# EAGLE board yep (EAGLE 7.6.0)
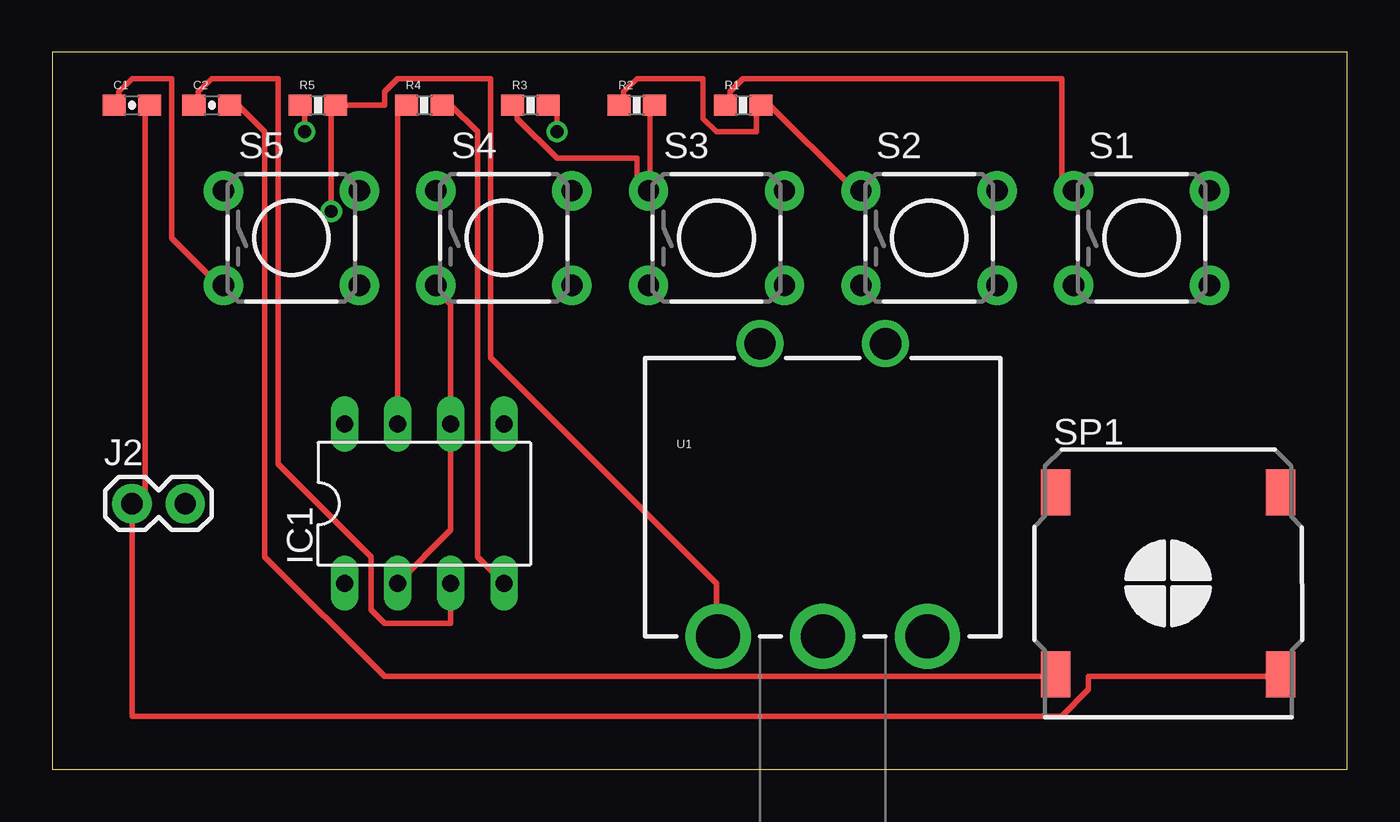
[diagram p0: board, top side]
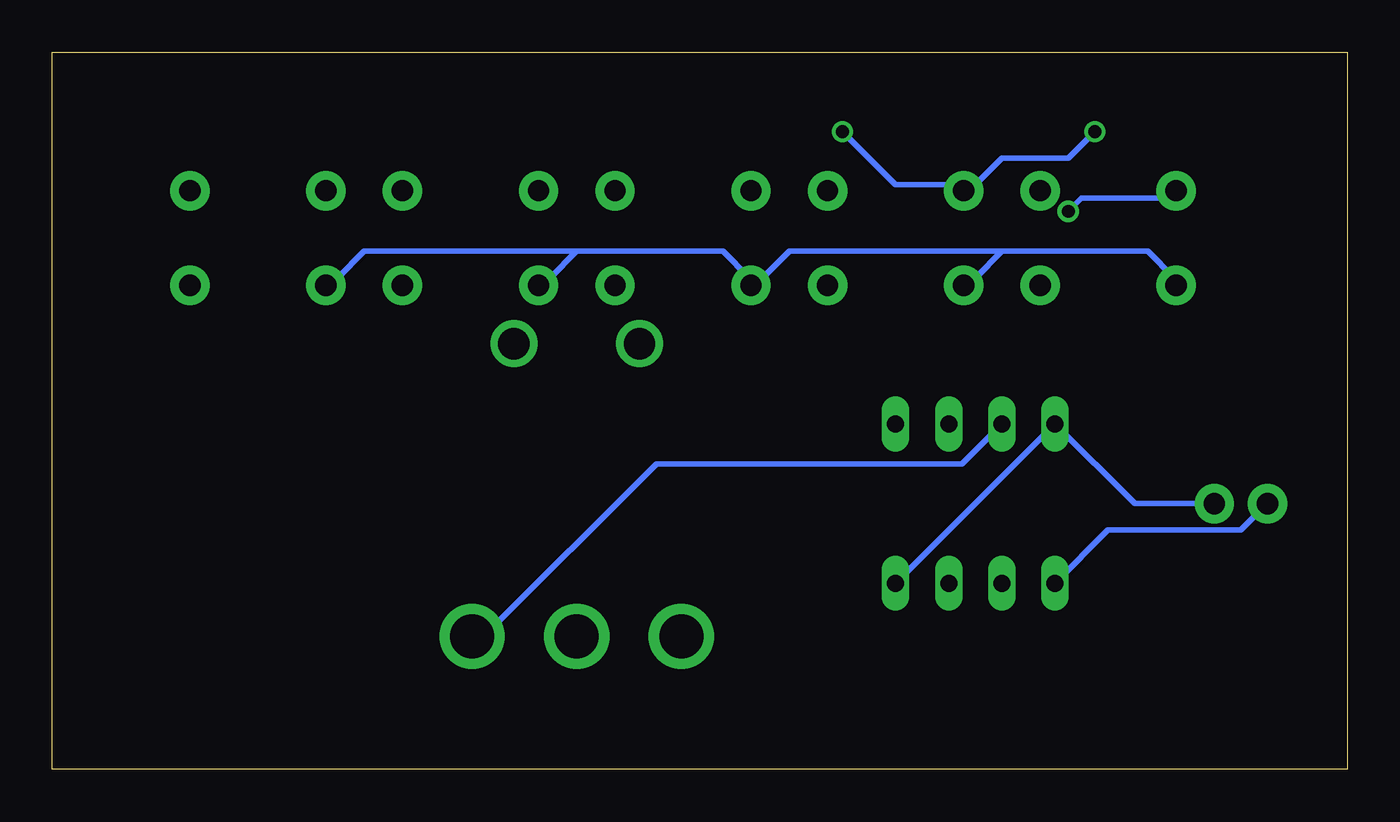
[diagram p1: board, bottom side, seen from below]

Size 61.9 x 34.28 mm. Coordinates in mm from the lower left corner, seen from the top.
Outline: 0,0 61.9,0 61.9,34.28 0,34.28 0,0
Copper layers (1*16): Top 0.035mm / dielectric 1.5mm / Bottom 0.035mm
Design rules "default": minimum track width 10mil, minimum drill 24mil, track to track 8mil, track to pad 8mil, pad to pad 8mil, via to via 8mil, smd to smd 8mil, copper to edge 40mil, drill to drill 8mil, minimum pad ring 10mil, minimum via ring 8mil, stop-mask expansion 4mil, vias tented up to drill 0mil, thermal gap 10mil

## Footprints (pad centres in the part's own frame; a part is rotated, then mirrored left to right if it is on the bottom)
0603-CAP = smd 1.1 x 1: 1 -0.85,0; 2 0.85,0
DIL-08 = drill 0.813 long: 1 -3.81,-3.81; 2 -1.27,-3.81; 3 1.27,-3.81; 4 3.81,-3.81; 5 3.81,3.81; 6 1.27,3.81; 7 -1.27,3.81; 8 -3.81,3.81
1X02 = drill 1.016 pad 1.88: 1 0,0; 2 2.54,0
0603-RES = smd 1.1 x 1: 1 -0.85,0; 2 0.85,0
TACTILE-PTH = drill 1.016 pad 1.88: 1 -3.251,2.261; 2 3.251,2.261; 3 -3.251,-2.261; 4 3.251,-2.261
SMS-1308MS-2-R = smd 1.4 x 2.2: + -5.375,-4.35; - 5.375,-4.35; M1 -5.375,4.35; M2 5.375,4.35
POT_PTH = drill 2.1: E@1 -5,0; E@2 5,0; WAND 0,0 | drill 1.5: S1 -3,14; S2 3,14

## Placement (x,y rotation side)
C1  100n  [0603-CAP]  3.81,31.75 0 top
C2  10u  [0603-CAP]  7.62,31.75 0 top
IC1  NE555  [DIL-08]  17.78,12.7 0 top
J2  [1X02]  3.81,12.7 0 top
R1  1k  [0603-RES]  33.02,31.75 0 top
R2  1k  [0603-RES]  27.94,31.75 0 top
R3  1k  [0603-RES]  22.86,31.75 0 top
R4  4.7k  [0603-RES]  17.78,31.75 0 top
R5  1k  [0603-RES]  12.7,31.75 0 top
S1  [TACTILE-PTH]  52.07,25.4 0 top
S2  [TACTILE-PTH]  41.91,25.4 0 top
S3  [TACTILE-PTH]  31.75,25.4 0 top
S4  [TACTILE-PTH]  21.59,25.4 0 top
S5  [TACTILE-PTH]  11.43,25.4 0 top
SP1  8Ohm  [SMS-1308MS-2-R]  53.34,8.89 0 top
U1  10k  [POT_PTH]  36.83,6.35 0 top

## Library data of the parts
C1 C2 = SparkFun-Capacitors
IC1 = st-microelectronics; MF: Arrow Electronics; MPN: NE555N; OC_FARNELL: 1467742; OC_NEWARK: 89K1486
J2 = SparkFun-Connectors
R1-R5 = SparkFun-Resistors
S1-S5 = SparkFun-Retired
SP1 = speaker
U1 = SparkFun-Electromechanical

## Nets
N$1: IC1.4 IC1.8 J2.2 R4.2
N$2: IC1.7 R4.1 U1.E@2
N$3: R1.2 R2.1 S2.1
N$4: R2.2 R3.1 S3.1
N$5: R3.2 R5.1 S4.1
N$6: R5.2 S5.1 U1.E@1
N$7: R1.1 S1.1
N$8: C1.1 IC1.2 IC1.6 S1.3 S2.3 S3.3 S4.3 S5.3
N$9: C2.1 IC1.3
N$10: C2.2 SP1.+
N$11: C1.2 IC1.1 J2.1 SP1.-

## Tracks (layer width: path | path; a pad name or v marks a point on that pad's centre or on a via)
N$1
  Top 0.254: IC1.4 20.32,10.16 20.32,30.48 19.05,31.75 R4.2
  Bottom 0.254: J2.2 10.16,12.7 IC1.8 IC1.4
N$2
  Top 0.254: IC1.7 16.51,31.75 R4.1
  Bottom 0.254: IC1.7 18.41,14.61 33.02,14.61 41.27,6.35 U1.E@2
N$3
  Top 0.254: R2.1 27.3,31.75 27.3,32.39 27.94,33.02 31.11,33.02 31.11,31.11 31.75,30.48 33.65,30.48 33.65,31.75 R1.2 34.29,31.75 38.1,27.94 S2.1
N$4
  Top 0.254: R3.1 22.23,31.75 22.23,31.11 24.13,29.21 27.94,29.21 27.94,27.94 S3.1 28.57,27.94 28.57,31.75 R2.2
N$5  (via drill 0.61)
  Top 0.254: v12.07,30.48 12.07,31.75 R5.1 | v24.13,30.48 24.13,31.75 R3.2
  Bottom 0.254: v12.07,30.48 13.34,29.21 16.51,29.21 17.78,27.94 S4.1 18.41,27.94 21.59,27.94 v24.13,30.48
N$6  (via drill 0.61)
  Top 0.254: v13.34,26.67 13.34,31.75 R5.2 15.88,31.75 15.88,32.39 16.51,33.02 20.96,33.02 20.96,19.68 31.75,8.89 31.75,6.35 U1.E@1
  Bottom 0.254: v13.34,26.67 12.7,27.31 8.26,27.31 S5.1
N$7
  Top 0.254: R1.1 32.38,31.75 32.38,32.39 33.02,33.02 48.26,33.02 48.26,27.94 S1.1
N$8
  Top 0.254: C1.1 3.18,31.75 3.18,32.39 3.81,33.02 5.71,33.02 5.71,25.4 7.62,23.5 S5.3 | IC1.2 19.05,11.43 IC1.6 19.05,22.22 18.41,22.86 S4.3
  Bottom 0.254: 36.83,24.77 29.84,24.77 28.57,23.5 S3.3 27.94,23.5 26.67,24.77 16.51,24.77 | 36.83,24.77 38.1,23.5 S2.3 | 36.83,24.77 46.99,24.77 48.26,23.5 S1.3 | 16.51,24.77 9.53,24.77 8.26,23.5 S5.3 | 16.51,24.77 17.78,23.5 S4.3
N$9
  Top 0.254: IC1.3 19.05,6.98 15.88,6.98 15.24,7.62 15.24,10.16 10.79,14.61 10.79,33.02 7.62,33.02 6.99,32.39 6.99,31.75 C2.1
N$10
  Top 0.254: C2.2 8.89,31.75 10.16,30.48 10.16,10.16 15.88,4.45 47.62,4.45 SP1.+
N$11
  Top 0.254: C1.2 4.45,31.75 4.45,13.34 J2.1 3.81,2.54 48.26,2.54 49.53,3.81 49.53,4.45 58.42,4.45 SP1.-
  Bottom 0.254: IC1.1 11.43,11.43 5.08,11.43 J2.1